# EAGLE board RobomasSwerve (EAGLE 9.6.2)

Size 100 x 80 mm. Coordinates in mm from the lower left corner, seen from the top.
Outline: 0,0 100,0 100,80 0,80 0,0
Copper layers (1*16): Top 0.035mm / dielectric 1.5mm / Bottom 0.035mm
Design rules "default": minimum track width 6mil, minimum drill 0.35mm, track to track 6mil, track to pad 6mil, pad to pad 6mil, via to via 6mil, smd to smd 6mil, copper to edge 40mil, drill to drill 6mil, minimum pad ring 10mil, minimum via ring 8mil, stop-mask expansion 4mil, vias tented up to drill 0mil, thermal gap 10mil
Net classes: 0 default: width 0.25 mm; 1 wide: width 0.5 mm; 2 6A: width 1.5 mm

## Footprints (pad centres in the part's own frame; a part is rotated, then mirrored left to right if it is on the bottom)
153CLV-0605 = smd 3.5 x 1.6: + 2.7,0; - -2.7,0
C0603 = smd 1.1 x 1: 1 -0.85,0; 2 0.85,0
C0603' = smd 1 x 1.1: 1 -0.85,0; 2 0.85,0
C0805 = smd 1.3 x 1.5: 1 -0.95,0; 2 0.95,0
CHIPLED_0805 = smd 1.2 x 1.2: A 0,-1.05; C 0,1.05
R1206 = smd 1.6 x 1.803: 1 -1.422,0; 2 1.422,0
3,2 = hole 3.2: 0,0
8P8C-LED = drill 0.9 pad 1.3: 1 3.57,-3.81; 2 2.55,-2.03; 3 1.53,-3.81; 4 0.51,-2.03; 5 -0.51,-3.81; 6 -1.53,-2.03; 7 -2.55,-3.81; 8 -3.57,-2.03 | drill 1 pad 1.422: GA 4.5,2.78; GC 7.04,2.78; YA -7.04,2.78; YC -4.5,2.78 | drill 1.6 pad 2.184: M1 -8,-2.85; M2 8,-2.85 | hole 3.2: 6.35,-6.35; -6.35,-6.35
AMASS_XT60PW-M = drill 2.7 square: 1 -3.6,-6 | drill 2.7: 2 3.6,-6 | drill 1 pad 1.2 long: S1 -6.75,0; S2 6.75,0
MA04-1 = drill 1.016 square: 1 3.81,0 | drill 1.016: 2 1.27,0; 3 -1.27,0; 4 -3.81,0
AMPHENOL_10118192-0001LF = smd 0.4 x 1.35: 1 -1.3,0; 2 -0.65,0; 3 0,0; 4 0.65,0; 5 1.3,0 | smd 2.1 x 1.6: SH1 -3.1,-0.125; SH2 3.1,-0.125 | smd 1.8 x 1.9: SH3 -3.8,-2.675; SH6 3.8,-2.675 | smd 1.9 x 1.9: SH4 -1.2,-2.675; SH5 1.2,-2.675
CONN4_1744426-4 = drill 0.94 pad 1.905 square: 1 7.493,0 | drill 0.94 pad 1.905: 2 5.004,0; 3 2.489,0; 4 0,0 | hole 2.794: 3.759,6.502
R0603 = smd 1 x 1.1: 1 -0.85,0; 2 0.85,0
SWITCH_TACTILE_3X6 = smd 2 x 1: P$1 -3.6,0; P$2 3.6,0
B1,27 = smd 1.27 x 1.27: TP 0,0
LQFP48 = smd 1.4 x 0.3: 1 -4.3,2.75; 2 -4.3,2.25; 3 -4.3,1.75; 4 -4.3,1.25; 5 -4.3,0.75; 6 -4.3,0.25; 7 -4.3,-0.25; 8 -4.3,-0.75; 9 -4.3,-1.25; 10 -4.3,-1.75; 11 -4.3,-2.25; 12 -4.3,-2.75; 25 4.3,-2.75; 26 4.3,-2.25; 27 4.3,-1.75; 28 4.3,-1.25; 29 4.3,-0.75; 30 4.3,-0.25; 31 4.3,0.25; 32 4.3,0.75; 33 4.3,1.25; 34 4.3,1.75; 35 4.3,2.25; 36 4.3,2.75 | smd 0.3 x 1.4: 13 -2.75,-4.3; 14 -2.25,-4.3; 15 -1.75,-4.3; 16 -1.25,-4.3; 17 -0.75,-4.3; 18 -0.25,-4.3; 19 0.25,-4.3; 20 0.75,-4.3; 21 1.25,-4.3; 22 1.75,-4.3; 23 2.25,-4.3; 24 2.75,-4.3; 37 2.75,4.3; 38 2.25,4.3; 39 1.75,4.3; 40 1.25,4.3; 41 0.75,4.3; 42 0.25,4.3; 43 -0.25,4.3; 44 -0.75,4.3; 45 -1.25,4.3; 46 -1.75,4.3; 47 -2.25,4.3; 48 -2.75,4.3
SO08 = smd 0.72 x 1.78: 1 -1.905,-2.35; 2 -0.635,-2.35; 3 0.635,-2.35; 4 1.905,-2.35; 5 1.905,2.35; 6 0.635,2.35; 7 -0.635,2.35; 8 -1.905,2.35
SOT95P240X110-3 = smd 1.18 x 0.609: 1 -1.024,0.95; 2 -1.024,-0.95; 3 1.024,0
SOT89 = smd 1 x 1.5: 1 -1.499,-1.981; 3 1.499,-1.981 | smd 1 x 2: 2 0,-1.727 | smd 2.2 x 3.7: 2@1 0,0.94
MINI-FLAT-4 = smd 1 x 0.5: 1 -3.24,0.635; 2 -3.24,-0.635; 3 3.24,-0.635; 4 3.24,0.635
CON-XH-2-STRAIGHT = drill 0.9 pad 1.778 square: P$1 1.21,-0.73 | drill 0.9 pad 1.778: P$2 -1.29,-0.73
CSTCE8M00G55 = smd 0.4 x 2.1: 1 -1.2,0; 2 0,0; 3 1.2,0

## Placement (x,y rotation side)
C1  EEEHA1E220P  [153CLV-0605]  -53.34,30.48 0 top  (outside the outline)
C2  [C0603]  -68.58,72.39 0 top  (outside the outline)
C3  100n  [C0603]  -41.91,62.23 0 top  (outside the outline)
C4  100n  [C0603]  -48.26,62.23 0 top  (outside the outline)
C5  1u  [C0603']  -62.23,68.58 0 top  (outside the outline)
C6  100n  [C0603']  -54.61,62.23 0 top  (outside the outline)
C7  4u7  [C0805]  -25.4,62.23 0 top  (outside the outline)
C8  100n  [C0603']  -60.96,62.23 0 top  (outside the outline)
C9  100n  [C0603']  -67.31,62.23 0 top  (outside the outline)
C10  100n  [C0603']  -17.78,68.58 0 top  (outside the outline)
C11  100n  [C0603']  -24.13,68.58 0 top  (outside the outline)
C12  100n  [C0603']  -30.48,68.58 0 top  (outside the outline)
C13  100n  [C0603']  -36.83,68.58 0 top  (outside the outline)
C14  100n  [C0603']  -43.18,68.58 0 top  (outside the outline)
D1  GREEN  [CHIPLED_0805]  -53.34,52.07 0 top  (outside the outline)
D2  YELLOW  [CHIPLED_0805]  -40.64,40.64 0 top  (outside the outline)
D3  RED  [CHIPLED_0805]  -31.75,73.66 0 top  (outside the outline)
F1  [R1206]  -38.1,72.39 0 top  (outside the outline)
H1  MOUNT-HOLE3.2  [3,2]  -64.77,43.18 0 top  (outside the outline)
H2  MOUNT-HOLE3.2  [3,2]  93.22,6.61 0 top
H3  MOUNT-HOLE3.2  [3,2]  -26.67,54.61 0 top  (outside the outline)
H4  MOUNT-HOLE3.2  [3,2]  -35.56,54.61 0 top  (outside the outline)
J1  8P8C-LED  [8P8C-LED]  -39.37,12.7 0 top  (outside the outline)
J2  XT60PW-M  [AMASS_XT60PW-M]  -21.59,11.43 0 top  (outside the outline)
J3  MA04-1  [MA04-1]  33.02,49.53 0 top
J4  10118192-0001LF  [AMPHENOL_10118192-0001LF]  41.91,39.37 90 top
J5  EP2.5-4-SIDE  [CONN4_1744426-4]  -68,-10 0 top  (outside the outline)
R1  1k  [R0603]  -66.04,68.58 0 top  (outside the outline)
R2  470  [R0603]  -53.34,68.58 0 top  (outside the outline)
R3  60  [R0603]  -69.85,68.58 0 top  (outside the outline)
R4  60  [R0603]  -15.24,73.66 0 top  (outside the outline)
R5  1k5  [R0603]  -58.42,68.58 0 top  (outside the outline)
R6  1k  [R0603]  -19.05,73.66 0 top  (outside the outline)
R7  1k  [R0603]  -22.86,73.66 0 top  (outside the outline)
R8  1k  [R0603]  -26.67,73.66 0 top  (outside the outline)
R16  470  [R0603]  -48.26,68.58 0 top  (outside the outline)
S1  SWITCH_TACTILETOP  [SWITCH_TACTILE_3X6]  8.22,74.96 0 top
TP1  TPB1,27  [B1,27]  39.55,44.39 0 top
TP2  TPB1,27  [B1,27]  30.47,33.39 0 top
TP3  TPB1,27  [B1,27]  38.39,37.39 0 top
TP4  TPB1,27  [B1,27]  -59.69,72.39 0 top  (outside the outline)
TP5  TPB1,27  [B1,27]  -64.77,72.39 0 top  (outside the outline)
U1  STM32F302C  [LQFP48]  26.67,38.1 0 top
U2  NCV7351D1E  [SO08]  24.13,60.96 0 top
U3  SI8621AB-B-IS  [SO08]  24.13,52.07 0 top
U4  AP2127N-3.3TRG1  [SOT95P240X110-3]  36.93,36.82 180 bottom
U5  78L05F  [SOT89]  24.55,68.71 90 top
U6  TLP291  [MINI-FLAT-4]  24.28,46.34 0 top
U$1  XH-2-STRAIGHT  [CON-XH-2-STRAIGHT]  42.25,65.5 0 top
X1  CSTCE8M00G55  [CSTCE8M00G55]  19.34,38.58 270 top

## Library data of the parts
C1-C4 = rcl; SPICEPREFIX: C
C5-C14 R5-R8 = rcl
D1-D3 = led
F1 R1-R4 R16 = rcl; SPICEPREFIX: R
H1-H4 = holes
J1 = con-rj45; OC_FARNELL: unknown; OC_NEWARK: unknown
J2 = con-xt; AVAILABILITY: Unavailable; MF: AMASS; MP: XT60PW-M; PACKAGE: Package Analog Devices; PRICE: None
J3 = con-headers
J4 = con-usb; DESCRIPTION: USB - micro B USB 2.0 Receptacle Connector 5 Position Surface Mount, Right Angle; DIGI-KEY_PART_NUMBER: 609-4613-1-ND; DIGI-KEY_PURCHASE_URL: https://www.digikey.com/product-detail/en/amphenol-icc-fci/10118192-0001LF/609-4613-1-ND/2785378?utm_source=snapeda&utm_medium=aggregator&utm_campaign=symbol; MF: Amphenol ICC; MP: 10118192-0001LF; PACKAGE: None
J5 = con-ep2.5; MANUFACTURER_PART_NUMBER: 17444264; VENDOR: TE Connectivity
S1 = switch-tactile
TP1-TP5 = testpad
U1 = stm32_mcu
U2 = on-semi
U3 = silabs
U4 = torex
U5 = linear
U6 = toshiba; OC_FARNELL: unknown; OC_NEWARK: unknown
U$1 = con-xh
X1 = resonator

## Nets
!EMS: U1.41 U6.3
!RESET: C14.2 S1.P$2 U1.7
+3V3: C7.1 C8.1 C9.2 C10.2 C11.2 C12.2 C13.2 J3.1 TP2.TP U1.9 U1.24 U1.36 U1.48 U3.1 U4.2 U6.4
+5V [wide]: C5.1 C6.1 J4.1 J5.2 TP3.TP U4.3
+5V_ISO [wide]: C3.1 C4.1 U2.3 U2.5 U3.8 U5.1 U$1.P$2
+12V [6A]: F1.1 J1.4 J1.5 J1.GA U5.3
CAN_LED: J1.YA U1.40
CANH: R4.1 U2.7
CANL: R3.1 U2.6
CANRX: U1.45 U3.3
CANRX_ISO: U2.4 U3.6
CANTX: U1.46 U3.2
CANTX_ISO: U2.1 U3.7
DCIN [6A]: C1.+ F1.2 J2.2
EMS: J1.6 R16.1 U$1.P$1
ENC_A: J5.3
ENC_B: J5.4
GNDA: C5.2 C6.2 C7.2 C8.2 C9.1 C10.1 C11.1 C12.1 C13.1 C14.1 D1.C D2.C D3.C J3.4 J4.4 J4.5 J4.SH1 J4.SH2 J4.SH3 J4.SH4 J4.SH5 J4.SH6 J5.1 R2.1 S1.P$1 TP1.TP U1.8 U1.23 U1.35 U1.47 U3.4 U4.1 X1.2
GNDIO: C1.- C2.2 C3.2 C4.2 J1.3 J1.7 J1.8 J1.M1 J1.M2 J2.1 R1.1 U2.2 U2.8 U3.5 U5.2 U5.2@1 U6.2
LED0: R6.1
LED1: R7.1
LED2: R8.1
N$2: D2.A R7.2
N$3: J1.GC R1.2
N$4: J1.YC R2.2
N$5: D1.A R6.2
N$6: C2.1 R3.2 R4.2
N$7: U1.6 X1.3
N$8: U1.5 X1.1
N$11: R5.1 U1.31
N$21: D3.A R8.2
N$25: R16.2 U6.1
SWCLK: J3.3 U1.37
SWDIO: J3.2 U1.34
TIM1_CH1: U1.29
TIM1_CH2: U1.30
TIM2_CH1: U1.10
TIM2_CH2: U1.11
TIM3_CH1: U1.16
TIM3_CH2: U1.14
TIM4_CH1: U1.42
TIM4_CH2: U1.43
USB_DM: J4.2 TP4.TP U1.32
USB_DP: J4.3 R5.2 TP5.TP U1.33

## Tracks (layer width: path | path; a pad name or v marks a point on that pad's centre or on a via)
!EMS  (1 unrouted)
!RESET  (2 unrouted)
+3V3  (15 unrouted)
+5V  (5 unrouted)
+5V_ISO  (6 unrouted)
+12V  (4 unrouted)
CAN_LED  (1 unrouted)
CANH  (1 unrouted)
CANL  (1 unrouted)
CANRX  (1 unrouted)
CANRX_ISO  (1 unrouted)
CANTX  (1 unrouted)
CANTX_ISO  (1 unrouted)
DCIN  (2 unrouted)
EMS  (2 unrouted)
GNDA  (32 unrouted)
GNDIO  (16 unrouted)
N$2  (1 unrouted)
N$3  (1 unrouted)
N$4  (1 unrouted)
N$5  (1 unrouted)
N$6  (2 unrouted)
N$7  (1 unrouted)
N$8  (1 unrouted)
N$11  (1 unrouted)
N$21  (1 unrouted)
N$25  (1 unrouted)
SWCLK  (1 unrouted)
SWDIO  (1 unrouted)
USB_DM  (2 unrouted)
USB_DP  (3 unrouted)